# EAGLE board carcomputer_split1_top2 (EAGLE 9.3.2)

Size 58.09 x 93.97 mm. Coordinates in mm from the lower left corner, seen from the top.
Outline: 0,0 58.09,0 58.09,93.97 0,93.97 0,0
Copper layers (1*16): Top 0.035mm / dielectric 1.5mm / Bottom 0.035mm
Design rules "default": minimum track width 6mil, minimum drill 0.35mm, track to track 6mil, track to pad 6mil, pad to pad 6mil, via to via 6mil, smd to smd 6mil, copper to edge 40mil, drill to drill 6mil, minimum pad ring 10mil, minimum via ring 8mil, stop-mask expansion 4mil, vias tented up to drill 0mil, thermal gap 10mil

## Footprints (pad centres in the part's own frame; a part is rotated, then mirrored left to right if it is on the bottom)
AK300/2 = drill 1.321 long: 1 -2.515,0; 2 2.489,0
C025-050X050 = drill 0.813 octagon: 1 -1.27,0; 2 1.27,0
DO41-10 = drill 1.118: A 5.08,0; C -5.08,0
DO41Z10 = drill 1.118: A 5.08,0; C -5.08,0
DO35-7 = drill 0.813 long: A 3.81,0; C -3.81,0
B4B-ZR = drill 0.7 pad 1.1: 1 -2.25,0; 2 -0.75,0; 3 0.75,0; 4 2.25,0
2X14 = drill 1.016 octagon: 1 -16.51,-1.27; 2 -16.51,1.27; 3 -13.97,-1.27; 4 -13.97,1.27; 5 -11.43,-1.27; 6 -11.43,1.27; 7 -8.89,-1.27; 8 -8.89,1.27; 9 -6.35,-1.27; 10 -6.35,1.27; 11 -3.81,-1.27; 12 -3.81,1.27; 13 -1.27,-1.27; 14 -1.27,1.27; 15 1.27,-1.27; 16 1.27,1.27; 17 3.81,-1.27; 18 3.81,1.27; 19 6.35,-1.27; 20 6.35,1.27; 21 8.89,-1.27; 22 8.89,1.27; 23 11.43,-1.27; 24 11.43,1.27; 25 13.97,-1.27; 26 13.97,1.27; 27 16.51,-1.27; 28 16.51,1.27
1X04 = drill 1.016 long: 1 -3.81,0; 2 -1.27,0; 3 1.27,0; 4 3.81,0
1X02 = drill 1.016 long: 1 -1.27,0; 2 1.27,0
2X03 = drill 1.016 octagon: 1 -2.54,-1.27; 2 -2.54,1.27; 3 0,-1.27; 4 0,1.27; 5 2.54,-1.27; 6 2.54,1.27
RT-N/O12A3.5 = drill 1.3 pad 3: 11 7.56,3.78; 14 11.1,-3.78 | drill 1.3: A1 -12.6,-3.78; A2 -12.6,3.78
B2B-ZR = drill 0.7 pad 1.1: 1 -2.25,0; 2 -0.75,0
B3B-ZR = drill 0.7 pad 1.1: 1 -2.25,0; 2 -0.75,0; 3 0.75,0
TO220 = drill 1.118 long: 1 -2.54,-6.35; 2 0,-6.35; 3 2.54,-6.35 | hole 3.302: 0,11.176
0207/7 = drill 0.813 octagon: 1 -3.81,0; 2 3.81,0
B3F-10XX = drill 1.016 long: 1 -3.251,2.261; 2 3.251,2.261; 3 -3.251,-2.261; 4 3.251,-2.261
TO92-EBC = drill 0.813 long: B 0,-1.27; C -2.54,-1.27; E 2.54,-1.27
ESP32-DEVKITV1 = drill 1 pad 1.93: 3V3 -15.25,-12.54; D1 15.23,-12.54; D2 -7.63,-12.54; D3 12.69,-12.54; D4 -5.09,-12.54; D5 2.53,-12.54; D12 -7.63,12.865; D13 -10.17,12.865; D14 -5.09,12.865; D15 -10.17,-12.54; D16 -2.55,-12.54; D17 -0.01,-12.54; D18 5.07,-12.54; D19 7.61,-12.54; D21 10.15,-12.54; D22 17.77,-12.54; D23 20.31,-12.54; D25 2.53,12.865; D26 -0.01,12.865; D27 -2.55,12.865; D32 7.61,12.865; D33 5.07,12.865; D34 12.69,12.865; D35 10.15,12.865; D36 17.77,12.865; D39 15.23,12.865; EN 20.31,12.865; GND@1 -12.71,12.865; GND@2 -12.71,-12.54; VIN -15.25,12.865
LM2596S = drill 0.9 pad 2.54 square: IN+ -13.843,6.223; IN- -13.843,-4.953; OUT+ 15.113,6.223; OUT- 15.113,-4.953

## Placement (x,y rotation side)
APP1  [AK300/2]  54.61,5.08 90 top
C3  100u  [C025-050X050]  33.02,12.7 180 top
C5  100u  [C025-050X050]  33.02,5.08 180 top
CLAXON_CONN1  [AK300/2]  54.61,29.21 270 bottom
D10  1N4004  [DO41-10]  36.83,81.28 180 top
D11  1N4004  [DO41-10]  36.83,73.66 180 top
D12  BZX83C3V6  [DO41Z10]  36.83,77.47 0 top
D15  1N4148DO35-7  [DO35-7]  15.24,44.45 180 top
D16  1N4148DO35-7  [DO35-7]  15.24,41.91 180 top
DISPLAY1  B4B-ZR  [B4B-ZR]  54.61,66.04 90 top
ECU1  [AK300/2]  54.61,16.51 90 top
ENGINE_CUTOFF_CONN1  [AK300/2]  54.61,41.91 270 bottom
JP1  [2X14]  7.62,73.66 90 top
JP_I2C_3  [1X04]  22.86,76.2 0 top
JP_I2C_4  [1X04]  22.86,72.39 180 top
JP_PWR_3V1  [1X02]  48.26,74.3 0 top
JP_PWR_5V_3  [1X02]  48.26,83.82 0 top
JP_PWR_5V_4  [1X02]  48.26,79.38 0 top
JP_PWR_12V1  [1X02]  48.26,90.17 0 top
JP_SPI_2  [2X03]  24.13,55.88 180 top
JP_UART1  [1X04]  22.86,62.23 180 top
JP_UART3  [1X04]  22.86,67.31 180 top
K5  RT184012  [RT-N/O12A3.5]  43.18,44.45 270 top
K6  RT184012  [RT-N/O12A3.5]  43.18,13.97 270 top
OBDII1  B2B-ZR  [B2B-ZR]  54.61,82.55 90 top
PWR1  B3B-ZR  [B3B-ZR]  54.61,90.17 90 top
Q2  TIP136  [TO220]  25.4,96.52 0 top
R24  150  [0207/7]  13.97,33.02 180 top
R25  150  [0207/7]  13.97,30.48 180 top
R27  680  [0207/7]  13.97,16.51 0 top
R28  680  [0207/7]  13.97,19.05 0 top
R32  2k  [0207/7]  13.97,25.4 180 top
R33  2k  [0207/7]  13.97,27.94 180 top
R34  10k  [0207/7]  35.43,87.12 0 top
R42  26k  [0207/7]  35.56,85.09 0 top
R43  10k  [0207/7]  39.37,67.31 0 top
R44  10k  [0207/7]  39.37,69.85 0 top
R45  1k  [0207/7]  13.97,3.81 180 top
S2  [B3F-10XX]  53.98,54.61 90 top
STEERING_WHEEL1  B3B-ZR  [B3B-ZR]  54.61,74.93 90 top
T6  BC618  [TO92-EBC]  25.4,82.55 180 top
T7  BC618  [TO92-EBC]  33.02,55.88 90 top
T8  BC618  [TO92-EBC]  33.02,24.13 90 top
U$7  ESP32DEVKITV1  [ESP32-DEVKITV1]  15.24,25.4 90 top
U$10  LM2596S  [LM2596S]  36.83,77.47 270 top

## Library data of the parts
APP1 CLAXON_CONN1 ECU1 ENGINE_CUTOFF_CONN1 = con-ptr500-custom; OC_FARNELL: unknown; OC_NEWARK: unknown
C3 C5 = rcl; SPICEPREFIX: C
D10-D12 D15 D16 = diode
DISPLAY1 = con-jst-custom; MF: FARNELL; MPN: B4B-ZR(LF)(SN); OC_FARNELL: 1830916; OC_NEWARK: 37K9960
JP1 JP_I2C_3 JP_I2C_4 JP_PWR_3V1 JP_PWR_5V_3 JP_PWR_5V_4 JP_PWR_12V1 JP_SPI_2 JP_UART1 JP_UART3 = pinhead
K5 K6 = relay; MF: TYCO ELECTRONICS; MPN: RT184012; OC_FARNELL: unknown; OC_NEWARK: 08H3731
OBDII1 PWR1 STEERING_WHEEL1 = con-jst-custom
Q2 = transistor-pnp
R24 R25 R27 R28 R32-R34 R42-R45 = rcl; SPICEPREFIX: R
S2 = switch-omron; MPN: B3F-1000; OC_FARNELL: 176432; OC_NEWARK: 36M3542
T6-T8 = transistor-npn
U$7 = ESP32-DEVKITV1
U$10 = PSU

## Nets
+3V3: DISPLAY1.4 JP1.1 JP_PWR_3V1.2 STEERING_WHEEL1.2 U$7.3V3
+5V: JP1.4 JP_I2C_3.4 JP_I2C_4.4 JP_PWR_5V_3.2 JP_PWR_5V_4.2 JP_SPI_2.2 JP_UART1.4 JP_UART3.4 U$7.VIN U$10.OUT+
+12V: D15.C D16.C JP_PWR_12V1.2 K5.A2 K6.A2 PWR1.3 Q2.3 R44.2
APP_0_IN: APP1.1 JP1.6
APP_1_IN: APP1.2 JP1.8
APP_ANALOG_OUT_0: C5.1 JP1.26 R24.1
APP_ANALOG_OUT_1: C3.1 JP1.28 R25.1
APP_ENABLE: JP1.9 U$7.D27
APP_PWM_OUT_0: R24.2 U$7.D32
APP_PWM_OUT_1: R25.2 U$7.D33
BTN_0: R28.2 STEERING_WHEEL1.3 U$7.D36
BTN_1: R27.2 STEERING_WHEEL1.1 U$7.D39
CAN_CS: JP1.22 U$7.D2
CAN_H: JP1.19 OBDII1.2
CAN_INT: JP1.24 U$7.D4
CAN_L: JP1.21 OBDII1.1
CLAXON_ENABLE: R33.2 U$7.D25
ECU_OUT_0: ECU1.1 JP1.10 JP1.12
ECU_OUT_1: ECU1.2
ENGINE_CUTOFF_DISABLE: R32.2 U$7.D26
GND: C3.2 C5.2 D12.A DISPLAY1.1 JP1.27 JP_I2C_3.1 JP_I2C_4.1 JP_PWR_3V1.1 JP_PWR_5V_3.1 JP_PWR_5V_4.1 JP_PWR_12V1.1 JP_SPI_2.6 JP_UART1.1 JP_UART3.1 PWR1.2 R27.1 R28.1 R34.1 S2.1 S2.2 T6.E T7.E T8.E U$7.GND@1 U$7.GND@2 U$10.IN- U$10.OUT-
GPS_RX: JP1.15 JP_UART3.2
GPS_TX: JP1.17 JP_UART3.3
I2C0_SCL: JP1.23 JP_I2C_3.3 JP_I2C_4.3 U$7.D5
I2C0_SDA: JP1.25 JP_I2C_3.2 JP_I2C_4.2 U$7.D18
I2C1_SCL: DISPLAY1.3 U$7.D19
I2C1_SDA: DISPLAY1.2 U$7.D21
IGNITION: PWR1.1 R42.2
MCU_RESET: JP1.3 S2.3 S2.4 U$7.EN
N$33: D10.C D11.C R34.2 T6.B
N$35: D10.A R42.1
N$36: Q2.1 R43.1 R44.1
N$37: R43.2 T6.C
N$38: D11.A D12.C R45.1
N$45: D15.A K5.A1 T7.C
N$46: R32.1 T7.B
N$47: ENGINE_CUTOFF_CONN1.1 K5.11
N$48: ENGINE_CUTOFF_CONN1.2 K5.14
N$49: D16.A K6.A1 T8.C
N$50: R33.1 T8.B
N$51: CLAXON_CONN1.1 K6.11
N$52: CLAXON_CONN1.2 K6.14
PWR_ENABLE: R45.2 U$7.D23
PWR_IN+: JP1.2 Q2.2 U$10.IN+
SD_CS: JP1.20 U$7.D15
SENS_APP_0_IN: JP1.5 U$7.D34
SENS_APP_1_IN: JP1.7 U$7.D35
SPI_CS_1: JP_SPI_2.5 U$7.D22
SPI_MISO: JP1.18 JP_SPI_2.1 U$7.D13
SPI_MOSI: JP1.16 JP_SPI_2.4 U$7.D12
SPI_SCK: JP1.14 JP_SPI_2.3 U$7.D14
UART0_RX: JP_UART1.2 U$7.D3
UART0_TX: JP_UART1.3 U$7.D1
UART2_RX: JP1.13 U$7.D16
UART2_TX: JP1.11 U$7.D17

## Tracks (layer width: path | path; a pad name or v marks a point on that pad's centre or on a via)
+3V3  (4 unrouted)
+5V  (9 unrouted)
+12V  (7 unrouted)
APP_0_IN  (1 unrouted)
APP_1_IN  (1 unrouted)
APP_ANALOG_OUT_0  (2 unrouted)
APP_ANALOG_OUT_1  (2 unrouted)
APP_ENABLE  (1 unrouted)
APP_PWM_OUT_0  (1 unrouted)
APP_PWM_OUT_1  (1 unrouted)
BTN_0  (2 unrouted)
BTN_1  (2 unrouted)
CAN_CS  (1 unrouted)
CAN_H  (1 unrouted)
CAN_INT  (1 unrouted)
CAN_L  (1 unrouted)
CLAXON_ENABLE  (1 unrouted)
ECU_OUT_0  (2 unrouted)
ENGINE_CUTOFF_DISABLE  (1 unrouted)
GND  (26 unrouted)
GPS_RX  (1 unrouted)
GPS_TX  (1 unrouted)
I2C0_SCL  (3 unrouted)
I2C0_SDA  (3 unrouted)
I2C1_SCL  (1 unrouted)
I2C1_SDA  (1 unrouted)
IGNITION  (1 unrouted)
MCU_RESET  (3 unrouted)
N$33  (3 unrouted)
N$35  (1 unrouted)
N$36  (2 unrouted)
N$37  (1 unrouted)
N$38  (2 unrouted)
N$45  (2 unrouted)
N$46  (1 unrouted)
N$47  (1 unrouted)
N$48  (1 unrouted)
N$49  (2 unrouted)
N$50  (1 unrouted)
N$51  (1 unrouted)
N$52  (1 unrouted)
PWR_ENABLE  (1 unrouted)
PWR_IN+  (2 unrouted)
SD_CS  (1 unrouted)
SENS_APP_0_IN  (1 unrouted)
SENS_APP_1_IN  (1 unrouted)
SPI_CS_1  (1 unrouted)
SPI_MISO  (2 unrouted)
SPI_MOSI  (2 unrouted)
SPI_SCK  (2 unrouted)
UART0_RX  (1 unrouted)
UART0_TX  (1 unrouted)
UART2_RX  (1 unrouted)
UART2_TX  (1 unrouted)